# Altium PCB MRIAMP.PcbDoc (part 2 of 2)
Units mm, origin at the board's own origin, x right, y up, seen from the top; angles counter-clockwise.
Board outline 150.25 x 132.25 mm, 4 copper layers (Top Layer, Signal Layer 1, Signal Layer 2, Bottom Layer), stack 0.971 mm thick; 235 components, 124 nets, 584 pads, 101 vias.
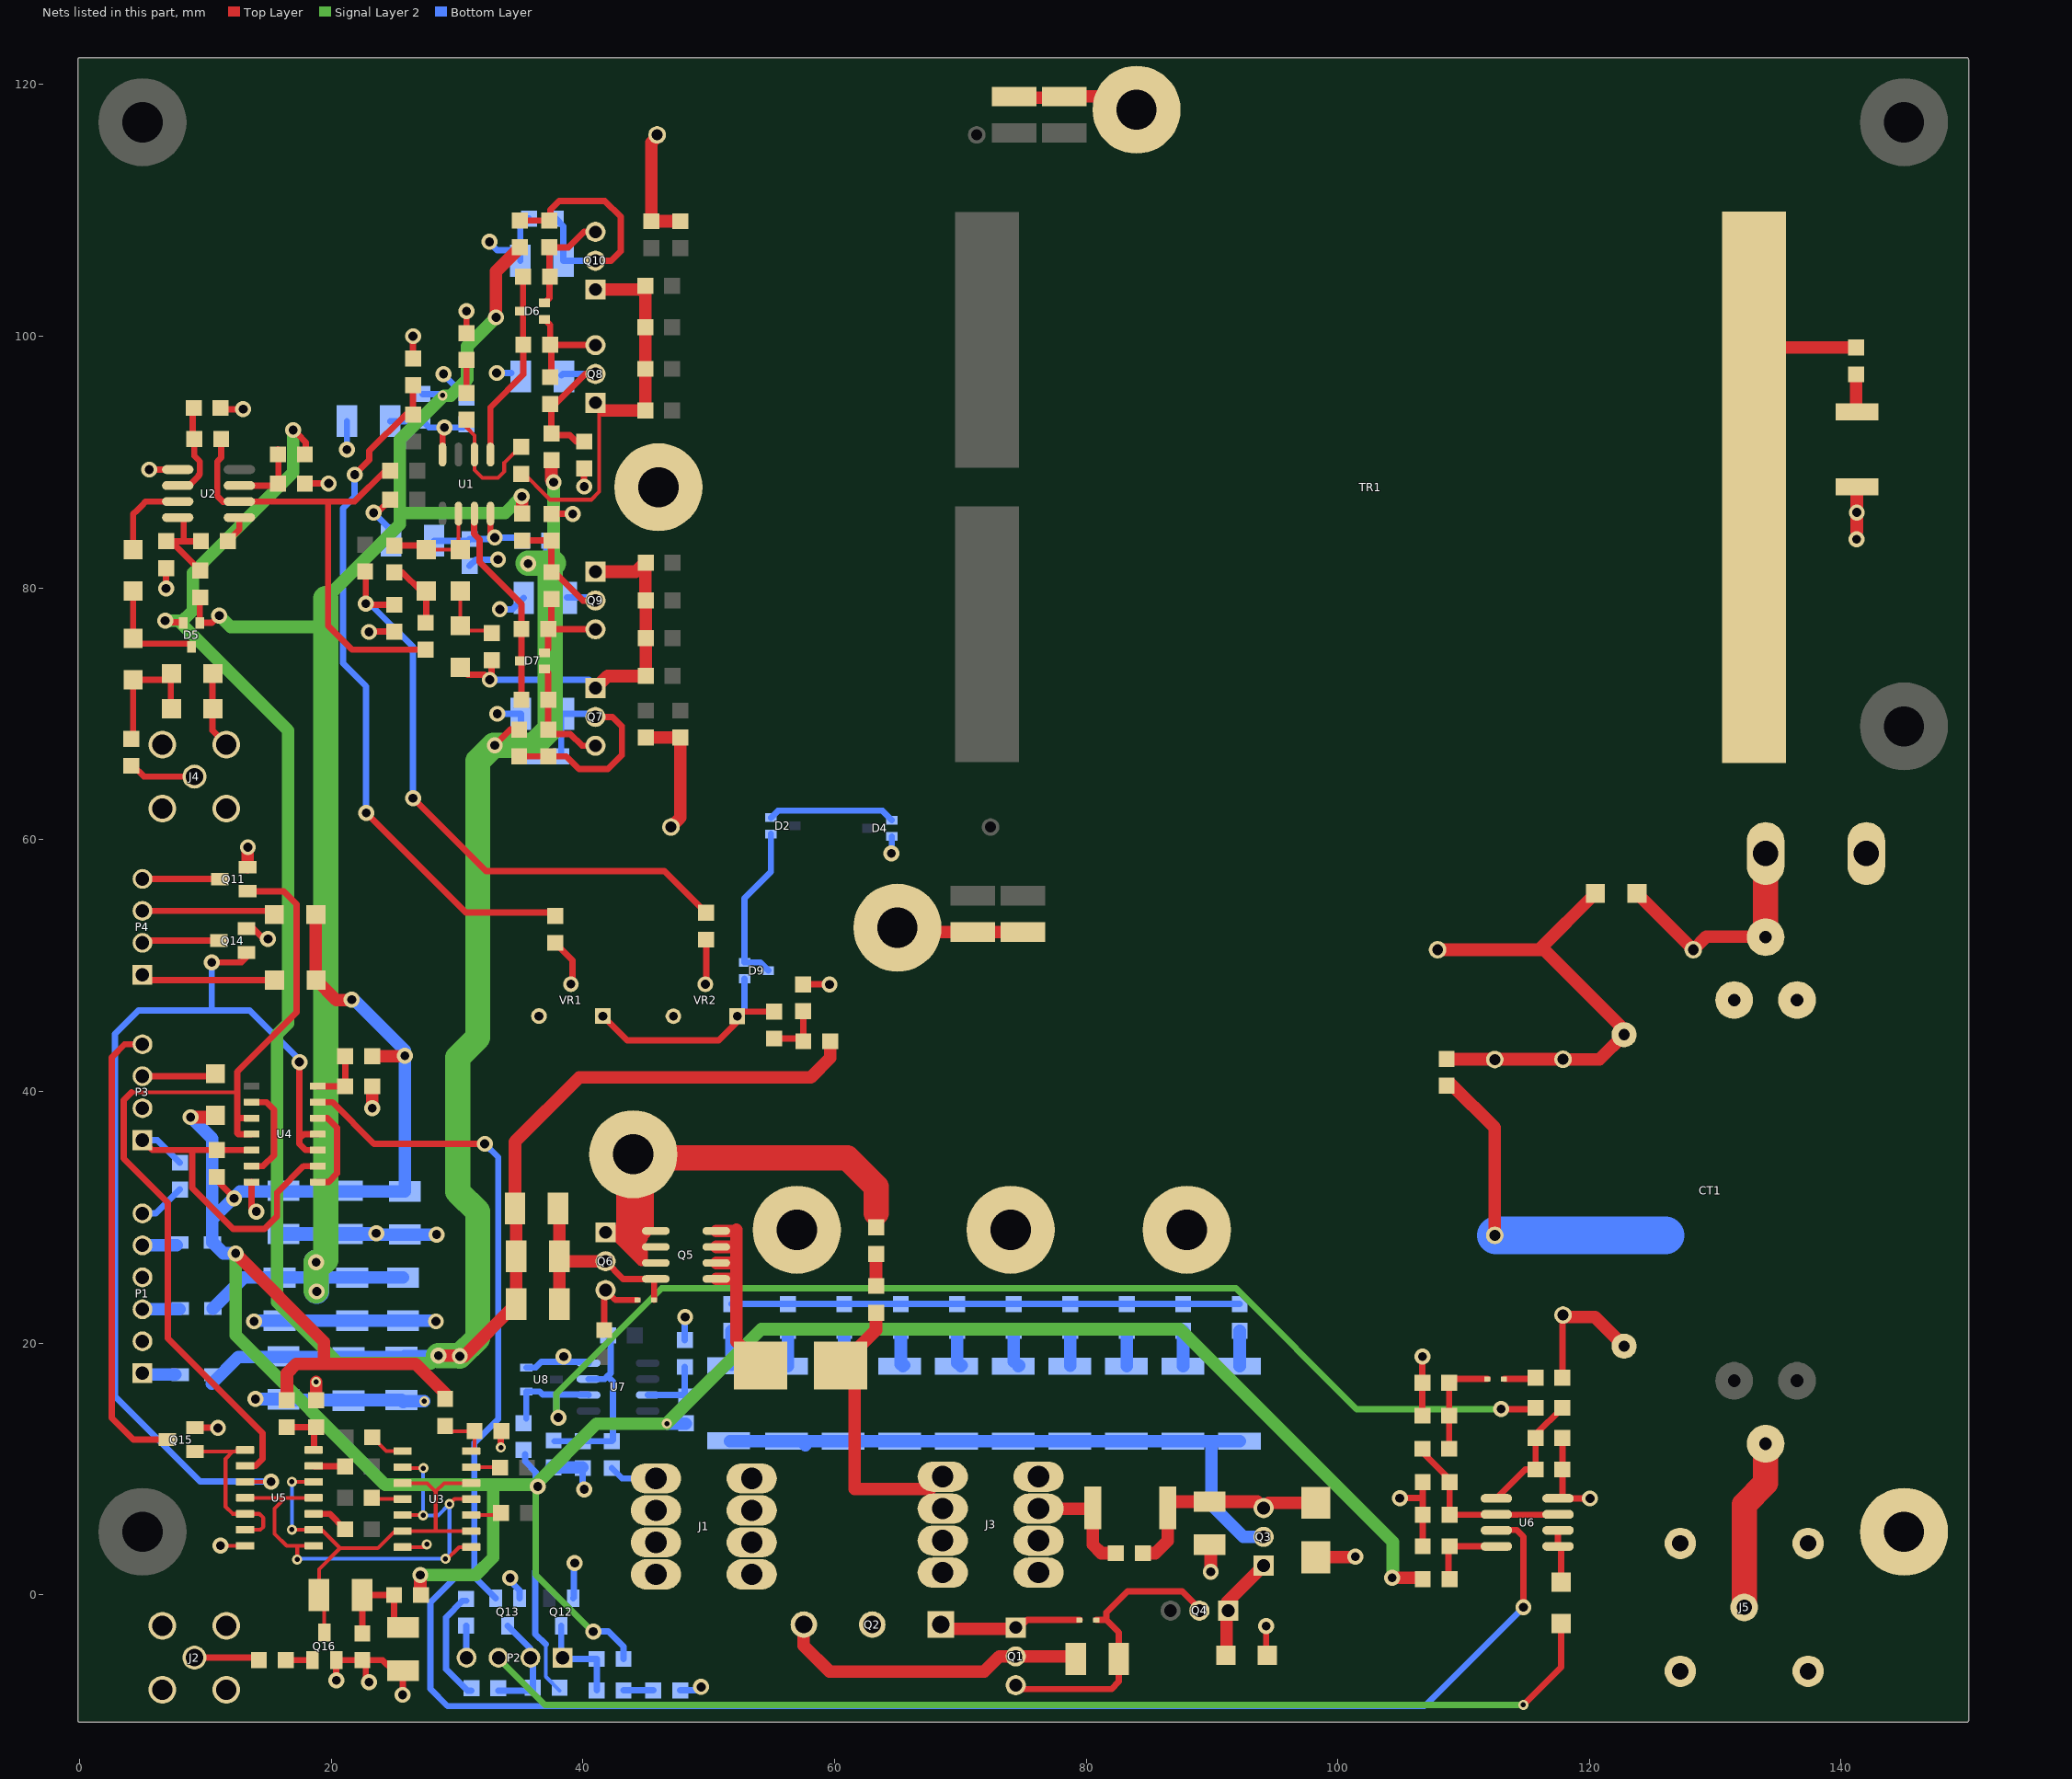
[diagram p4: the nets of this part, all layers, seen from the top]

## Via types
v1: diameter 1.27, hole 0.711, Top Layer to Bottom Layer, 85 vias
v2: diameter 0.8, hole 0.4, Top Layer to Bottom Layer, 16 vias

## Nets (pads, with @x,y where several pads share a name; then routed paths per layer and width w, separated by ;. In a path a pad name is that pad's centre, name@x,y a point inside that pad or via, vN(x,y) a via of type N, cw(c..) or ccw(c..) an arc to the next point about the centre after c; other vN are vias at no path point) (continued)
GND: C1.1 C12.1 C14.1 C18.1 C23.1 C24.1 C25.1 C26.2 C27.1 C28.1 C29.2 C33.2 C37.2 C39.2 C40.1 C41.1 C43.2 C44.2 C45.2 C46.2 C47.2 C48.2 C49.2 C50.2 C51.2 C52.2 C53.2 C54.2 C55.1 C56.1 C58.1 C59.1 C61.1 C62.1 C63.1 C64.1 C65.1 C66.1 C67.1 C126.2 C140.1 D3.1 D4.2 J2.2 J2.3 J2.4 J2.5 J4.2 J4.3 J4.4 J4.5 MH7.1 MH8.1 P1.2 P1.4 P1.6 P2.4 P3.2 Q5.1 Q5.2 Q5.3 Q6.1 Q11.2 Q12.2 Q13.2 Q14.2 Q15.2 Q16.2 R19.1 R20.1 R21.2 R48.1 R49.1 R57.1 R73.2 R74.2 R92.2 R94.2 R95.1 R96.1 U2.1 U3.7 U4.7 U5.7 U6.4 U7.4 U8.2 VR1.3 VR2.3 | length 211.5
  Top Layer w0.3: v1@11.5,3.9 11.51,3.89 U5.7@13.154,3.89 ; U3.7@25.675,3.79 27.39,3.79 v2(27.6,4)
  Top Layer w0.5: v1(5.525,89.4) 7.795,89.4 U2.1@7.8,89.405 ; v1(6.875,79.95) 6.875,81.021 C41.1@6.9,81.046 ; Q15.2@9.175,13.275 v1@10.475,13.275 ; R48.1@10.552,72.771 10.552,68.666 J4.3@11.667,67.551 ; R57.1@11.184,94.2 v1(13,94.2) ; Q14.2@13.641,52.925 Q14.2@13.275,52.925 13.825,52.925 v1@14.65,52.1 ; v1@13.675,30.675 U4.7@13.675,32.79 ; C28.1@17.904,88.3 v1(19.8,88.3) ; v1(20.4,-6.8) Q16.2@20.4,-5.2 C55.1@22.75,-5.175 ; v1@22.75,-6.675 C55.1@22.75,-5.175 ; v1(23,76.5) 23.25,76.5 23.279,76.529 C14.1@25,76.529 ; v1@23.696,86 C33.2@24.696,87 ; v1@25.7,-7.925 C54.2@25.7,-6.029 24.904,-6.029 24.075,-5.2 C55.1@22.75,-5.175 ; C12.1@26.5,98.24 v1(26.5,100) ; C23.1@30.75,100.25 v1(30.75,102) ; v2(33.475,11.7) 33.475,12.7 33.65,12.875 C58.1@33.525,13 ; C44.2@37.5,85.884 39.191,85.884 v1(39.2,85.875) ; v1@40.025,87.925 39.975,87.925 v1(40.1,88.05) C24.1@40.1,89.5 ; C1.1@57.512,48.5 v1(59.6,48.5) ; R19.1@94.3,-4.8 v1@94.3,-2.6 ; v1@104.9,7.7 v1(104.925,7.675) 106.75,7.675 ; R94.2@106.716,14.225 C63.1@106.716,16.85 106.716,18.559 v1@106.725,18.55 ; C56.1@106.75,3.85 R95.1@106.75,6.35 106.75,7.675 ; C64.1@106.75,8.95 106.75,7.675 ; U6.4@117.5,7.655 v1(120.045,7.655) ; 117.85,8.005 C65.1@117.85,9.95 R96.1@117.85,12.45 ; v1@94.3,-2.6 v1(94.3,-2.5) 94.2,-2.4 94.2,-2.5 v1@94.3,-2.6
  Top Layer w1: Q11.2@13.35,57.8 v1@13.35,59.05 ; v2(18.8,16.9) 18.8,15.725 C66.1@18.85,15.675 ; v1(23.25,38.65) C61.1@23.25,40.4 ; Q6.1@41.8,28.79 41.915,28.905 44.675,28.905 44.675,28.33 44.475,28.13 44.475,27.38 44.675,27.18 44.675,26.605 42.955,28.325 43.84,28.325 ; MH8.1@44,35 MH8.1@44.3,34.7 ; R20.1@89.8,3.971 89.9,3.871 v1@89.9,2.2 ; D3.1@98.355,2.982 101.118,2.982 v1@101,3 ; v1@141.25,84.5 v1(141.25,86) R21.2@141.25,88.025
  Top Layer w2: MH8.1@44.3,34.7 61,34.7 63.3,32.4 63.3,30.325
  Top Layer w3: 44.15,29.38 MH8.1@44.15,32.475
  Bottom Layer w0.5: P1.6@5,30.3 6.075,30.3 C67.1@7.975,32.2 ; v1(21.25,91) C37.2@21.25,93.25 ; v1(23.375,85.975) 24.75,84.6 C29.2@24.75,83.75 ; v1(28.925,97) 28.884,97 C39.2@30.75,95.134 ; P2.4@30.725,-5.115 R74.2@30.725,-2.459 ; C27.1@31,81.75 31.5,82.25 v1(33.25,82.25) ; v1@32.725,107.275 33.175,106.825 C40.1@34.6,106.825 ; v1(33.15,97.079) C26.2@34.321,97.079 ; v1(33.2,70) C126.2@35.071,70 35.071,68.479 36.15,67.4 C25.1@36.15,66.625 ; v1(33.4,78.3) 34.4,78.3 C140.1@35.3,79.2 ; v1@34.175,1.15 34.975,0.35 Q13.2@34.975,-0.275 ; C40.1@35.025,106 35.025,108.659 C43.2@35.716,109.35 ; U8.2@35.5,18.05 36.25,18.05 36.7,18.5 v1@38.575,18.5 ; v1@38.575,19.25 v1@38.575,18.5 ; Q12.2@39.225,-0.275 39.275,-0.225 v1@39.275,2.575 ; R92.2@39.988,10.066 39.988,8.712 v1@40,8.7 ; U7.4@40.45,18.405 40.355,18.5 v1@38.575,18.5 ; R73.2@47.734,-7.6 v1@49.2,-7.6 ; C59.1@48.1,20.234 v1@48.1,21.8 ; D4.2@64.55,60.25 64.55,59.15 v1@64.6,59.1
  Bottom Layer w1: v1@13.752,21.777 C50.2@16.2,21.777 ; v1@14.125,15.55 16.171,15.55 C45.2@16.2,15.521 ; C51.2@16.2,28.671 16.254,28.725 v1(23.575,28.725) ; C50.2@16.206,21.771 C49.2@25.7,21.771 v1@28.346,21.771 ; C45.2@16.25,15.471 C47.2@25.575,15.471 25.721,15.325 25.771,15.375 v2(27.4,15.375) ; C51.2@16.25,28.621 C53.2@25.85,28.621 v1(28.371,28.621) ; C62.1@37.5,10.116 R92.2@39.938,10.116
  other v1: 25.675,-7.95 49.4,-7.325 23,-6.95 34.225,1.325 89.9,1.825 39.35,2.525 101.4,3.025 11.2,3.9 40.1,8.375 11,13.25 13.975,15.55 38.475,18.925 106.725,18.925 13.875,21.725 28.325,21.725 48.125,22.075 14.05,30.45 14.975,52.1 64.525,58.9 13.375,59.4 141.225,83.875 32.575,107.5
LEDactive: P3.4 Q15.3 | length 36.7
  Top Layer w0.5: P3.4@5,43.74 3.59,43.74 2.55,42.7 2.55,14.05 4.275,12.325 Q15.3@6.975,12.325
LEDdcfail: P4.4 Q11.3 | length 6.2
  Top Layer w0.5: P4.4@5,56.88 Q11.3@11.15,56.88
LEDprfl: P4.2 Q14.3 | length 5.9
  Top Layer w0.5: P4.2@5.175,51.975 Q14.3@11.075,51.975
NetC1_2: C1.2 R1.1 R13.2 | length 4.8
  Top Layer w0.5: R13.2@55.2,44.2 57.3,44.2 R1.1@57.524,43.976 57.524,46.354 C1.2@57.512,46.366
NetC2_1: C2.1 C3.1 C4.1 C5.1 C6.1 C7.1 C8.1 C9.1 C10.1 C11.1 MH1.1 MH2.1 MH3.1 | length 40.4
  Bottom Layer w0.5: C6.1@51.8,23.1 C5.1@56.289,23.1 C4.1@60.778,23.1 C3.1@65.267,23.1 C2.1@69.756,23.1 C11.1@74.244,23.1 C10.1@78.733,23.1 C9.1@83.222,23.1 C8.1@87.711,23.1 C7.1@92.2,23.1
NetC2_2: C2.2 R3.1 | length 2.6
  Bottom Layer w1: R3.1@69.756,18.424 C2.2@69.756,20.966 ; R3.1@70.027,18.152 R3.1@70.098,18.223
NetC3_2: C3.2 R4.1 | length 2.8
  Bottom Layer w1: R4.1@65.267,18.327 C3.2@65.267,20.966 ; R4.1@65.441,18.152 R4.1@65.526,18.237
NetC4_2: C4.2 R5.1 | length 2.9
  Bottom Layer w1: R5.1@60.778,18.229 C4.2@60.778,20.966 ; R5.1@60.855,18.152 R5.1@60.954,18.251
NetC5_2: C5.2 R6.1 | length 2.8
  Bottom Layer w1: R6.1@56.289,18.172 C5.2@56.289,20.966
NetC6_2: C6.2 R7.1 | length 2.9
  Bottom Layer w0.5: R7.1@51.683,18.152 R7.1@51.8,18.269
  Bottom Layer w1: R7.1@51.8,18.269 C6.2@51.8,20.966
NetC7_2: C7.2 R8.1 | length 2.8
  Bottom Layer w1: R8.1@92.2,18.152 C7.2@92.2,20.966
NetC8_2: C8.2 R9.1 | length 2.8
  Bottom Layer w1: R9.1@87.711,18.165 C8.2@87.711,20.966
NetC9_2: C9.2 R10.1 | length 2.8
  Bottom Layer w1: R10.1@83.222,18.178 C9.2@83.222,20.966
NetC10_2: C10.2 R11.1 | length 2.8
  Bottom Layer w1: R11.1@78.733,18.191 C10.2@78.733,20.966
NetC11_2: C11.2 R12.1 | length 2.5
  Bottom Layer w1: R12.1@74.244,18.521 C11.2@74.244,20.966 ; R12.1@74.614,18.152 R12.1@74.67,18.208
NetC12_2: C12.2 R14.1 R15.2 | length 55.8
  Top Layer w0.5: v1(21.861,89) 23.021,90.16 23.021,90.896 25.895,93.77 R15.2@26.5,93.77 C12.2@26.5,96.107 ; v1(22.775,62.125) 30.7,54.2 37.534,54.2 R14.1@37.8,53.934
  Bottom Layer w0.5: v1(21.861,89) 21.861,87.261 20.939,86.339 20.939,74.011 22.775,72.175 v1(22.775,62.125)
NetC13_1: C13.1 D3.2 Q3.3 R16.2 R20.2 | length 17.4
  Top Layer w1: C13.1@84.5,3.3 85.5,3.3 86.475,4.275 R16.2@86.475,6.9 86.975,7.4 R20.2@89.8,7.4 93.59,7.4 Q3.3@94.1,6.89 94.51,7.3 D3.2@98.255,7.3
NetC14_2: C14.2 R17.1 R18.2 | length 49.1
  Top Layer w0.5: R18.2@22.688,81.3 22.75,81.238 v1(22.75,78.75) 22.837,78.663 C14.2@25,78.663 ; v1(26.5,63.3) 32.3,57.5 46.484,57.5 R17.1@49.8,54.184
  Bottom Layer w0.5: v1(22.75,78.75) 23.075,78.75 26.5,75.325 v1(26.5,63.3)
NetC15_1: C15.1 TR1.2 | length 18.2
  Top Layer w1: TR1.2@133.096,88.011 133.096,97.396 134.8,99.1 C15.1@141.2,99.1
NetC15_2: C15.2 R21.1 | length 3
  Top Layer w1: C15.2@141.2,96.966 141.2,94.025 R21.1@141.25,93.975
NetC16_1: C16.1 C144.1 MH5.1 | length 10.4
  Top Layer w1: MH5.1@65,53 65.35,52.65 72,52.65 C144.1@75.3,52.65
NetC17_1: C17.1 C143.1 MH4.1 | length 12.6
  Top Layer w1: C143.1@73.375,118.95 77.2,118.95 77.3,119.05 82.95,119.05 MH4.1@84,118 MH4.1@82.967,116.967
NetC18_2: C18.2 R23.1 | length 2.5
  Top Layer w1: R23.1@63.3,24.534 C18.2@63.3,27.066
NetC23_2: C23.2 R27.1 | length 2.6
  Top Layer w0.5: R27.1@30.75,95.5 C23.2@30.75,98.116
NetC24_2: C24.2 C26.1 Q8.2 R31.1 R38.1 | length 12.9
  Top Layer w0.5: C24.2@40.1,91.634 39.466,91.634 38.966,92.134 37.5,92.134 37.5,94.366 37.25,94.616 R38.1@37.4,94.616 37.816,94.616 40.2,97 Q8.2@41,97
  Bottom Layer w0.5: C26.1@38.3,96.9 38.4,97 Q8.2@41,97
NetC25_2: C25.2 C126.1 Q7.2 R32.2 R39.1 | length 19.9
  Top Layer w0.5: R32.2@34.938,66.616 R39.1@37.25,66.616 38.684,66.616 39.7,65.6 42,65.6 43.1,66.7 43.1,69 42.35,69.75 Q7.2@41,69.75
  Bottom Layer w0.5: C25.2@38.284,66.625 C126.1@38.284,69.784 ; C126.1@38.5,70 40.75,70 Q7.2@41,69.75 Q7.2@40.75,69.5
NetC27_2: C27.2 C29.1 R33.1 U1.8 | length 9.4
  Top Layer w0.5: U1.8@32.655,85.9 32.655,84.095 32.75,84 v1(33,84)
  Bottom Layer w0.5: C29.1@28.179,83.75 30.866,83.75 C27.2@31,83.884 32.884,83.884 v1(33,84) 34.938,84 R33.1@35.188,83.75
NetC28_2: C28.2 R36.1 U2.7 | length 5.7
  Top Layer w0.5: U2.7@12.7,88.135 15.247,88.135 15.8,88.688 15.8,90.971 R36.1@15.771,91
NetC30_1: C30.1 D6.1 Q8.3 R38.2 | length 8.4
  Top Layer w0.5: D6.1@36.95,101.35 37.4,100.9 C30.1@37.4,99.314 ; R38.2@37.25,96.75 37.5,97 37.5,99.314 40.976,99.314 Q8.3@41,99.29
NetC30_2: C30.2 C35.2 D6.3 U1.1 | length 15.3
  Top Layer w0.5: U1.1@32.655,90.6 32.655,94.355 35.255,96.955 C30.2@35.255,99.145 ; C30.2@34.95,99.314 35.25,99.614 35.25,101.8 D6.3@35.05,102 35.25,102.2 C35.2@35.25,104.737
NetC31_1: C31.1 D7.1 Q7.3 R39.2 | length 9.2
  Top Layer w0.5: D7.1@36.95,73.553 37.25,73.253 C31.1@37.25,71.12 R39.2@37.25,68.75 37.6,68.4 39,68.4 39.94,67.46 Q7.3@41,67.46
NetC31_2: C31.2 C36.2 D7.3 U1.7 | length 16.2
  Top Layer w0.5: U1.7@31.35,85.75 31.35,84.3 31.8,83.85 31.8,82.05 35.116,78.734 C36.2@35.116,76.75 C31.2@35.116,71.12
NetC32_2: C32.2 C38.1 R51.2 U2.6 | length 38
  Top Layer w0.5: R51.2@11.25,91.838 11.25,90.35 10.946,90.046 10.946,87.284 11.4,86.83 11.4,86.865 U2.6@12.7,86.865 21.865,86.865 24.312,89.312 C32.2@24.696,89.312 ; 19.75,86.75 19.75,77 21.648,75.102 C38.1@27.5,75.102
NetC34_2: C34.2 J4.1 | length 5.2
  Top Layer w0.5: C34.2@4.25,65.866 5.106,65.011 J4.1@9.127,65.011
NetC35_1: C35.1 D6.2 Q10.3 R53.1 | length 8.7
  Top Layer w0.5: D6.2@36.95,102.65 37.338,103.038 R53.1@37.338,107.061 38.861,107.061 40.09,108.29 Q10.3@41,108.29
NetC36_1: C36.1 D7.2 Q9.3 R54.1 | length 8.2
  Top Layer w0.5: D7.2@36.95,74.853 37.25,75.153 C36.1@37.25,76.71 ; R54.1@37.5,79.116 37.5,76.96 C36.1@37.25,76.71 ; Q9.3@41,76.71 C36.1@37.25,76.71
NetC37_1: C37.1 C39.1 R52.1 U1.4 | length 8.6
  Top Layer w0.5: U1.4@28.845,90.6 28.845,92.595 v1(29,92.75)
  Bottom Layer w0.5: C37.1@24.679,93.25 27.227,93.25 R52.1@27.25,93.273 27.773,92.75 v1(29,92.75) 30.5,92.75 C39.1@30.75,93
NetC38_2: C38.2 C142.2 R47.2 | length 5.7
  Top Layer w0.5: C142.2@25,81.234 25.666,81.234 27.15,79.75 R47.2@27.557,79.75 27.557,77.292 C38.2@27.5,77.235
NetC40_2: C40.2 C43.1 Q10.2 R53.2 R55.1 | length 20.7
  Top Layer w0.5: R55.1@35,109.195 37.162,109.195 37.425,109.458 37.425,110.05 38.125,110.75 41.75,110.75 43,109.5 43,106.75 42.25,106 Q10.2@41,106
  Bottom Layer w0.5: C43.1@37.85,109.35 38.454,108.746 C40.2@38.454,106 Q10.2@41,106
NetC41_2: C41.2 C42.2 R50.1 U2.4 | length 8.2
  Top Layer w0.5: C41.2@6.9,83.525 C41.2@6.992,83.617 ; C41.2@6.9,83.709 C41.2@6.992,83.617 ; 8.273,83.746 U2.4@8.273,85.516 ; R50.1@9.6,81.375 7.358,83.617 C41.2@6.992,83.617 ; C42.2@9.6,83.7 7.075,83.7 C41.2@6.992,83.617
NetC42_1: C42.1 U2.5 | length 2.3
  Top Layer w0.5: C42.1@11.775,83.725 12.7,84.65 U2.5@12.7,85.595
NetC44_1: C44.1 C140.2 Q9.2 R54.2 R56.2 | length 11.6
  Top Layer w0.5: R56.2@35.175,83.766 C44.1@37.484,83.766 ; C44.1@37.5,83.75 R54.2@37.5,81.25 37.75,81.25 40,79 Q9.2@41,79
  Bottom Layer w0.5: C140.2@38.729,79.25 40.75,79.25 Q9.2@41,79
NetC54_1: C54.1 C55.2 R60.2 R62.2 | length 7.4
  Top Layer w0.5: R62.2@22.454,-0.025 R60.2@24.991,-0.025 C54.1@24.991,-1.891 ; C55.2@22.475,-3.066 R62.2@22.475,-0.046
NetC56_2: C56.2 R79.2 U6.8 | length 6.3
  Top Layer w0.5: R79.2@108.784,1.35 108.784,3.85 U6.8@112.595,3.85
NetC57_1: C57.1 C60.2 CT1.3 R80.2 R83.2 R86.1 | length 38.7
  Top Layer w1: R80.2@107.93,51.25 116,51.25 ; C60.2@108.884,42.55 R83.2@117.755,42.55 ; R83.2@117.9,42.545 120.795,42.545 CT1.3@122.75,44.5 122.75,44.9 116.4,51.25 116,51.25 ; C57.1@120.475,55.725 116,51.25
NetC57_2: C57.2 CT1.1 P5.1 R80.1 | length 19.2
  Top Layer w1: C57.2@123.777,55.723 R80.1@128.25,51.25 129.3,52.3 133.95,52.3 CT1.1@134,52.25
  Top Layer w2: CT1.1@134,52.25 P5.1@134,58.9
NetC58_2: C58.2 R81.2 U3.14 | length 3.2
  Top Layer w0.3: R81.2@29.466,13 C58.2@31.391,13 U3.14@31.391,11.676
NetC59_2: C59.2 R82.2 U7.7 | length 5.2
  Bottom Layer w0.5: U7.7@45.15,15.865 48.098,15.865 48.1,15.867 C59.2@48.1,18.1
NetC61_2: C61.2 R87.2 U4.14 | length 4.6
  Top Layer w0.5: U4.14@18.935,40.4 C61.2@21.116,40.4 R87.2@21.116,42.8
NetC62_2: C62.2 R88.2 R92.1 R97.1 U7.3 | length 15
  Bottom Layer w0.5: C62.2@37.734,12.199 R92.1@39.988,12.199 R88.2@42.3,12.199 42.4,12.299 42.4,16.935 41.968,17.368 ; U7.3@40.45,17.135 41.735,17.135 41.968,17.368 ; R97.1@42,20.6 42.2,20.4 42.2,17.6 41.968,17.368
NetC63_2: C63.2 D10.1 R90.1 R94.1 | length 8
  Top Layer w0.5: R90.1@108.85,11.6 R94.1@108.85,14.225 C63.2@108.85,16.85 ; C63.2@109.15,17.15 D10.1@111.89,17.15
NetC64_2: C64.2 R90.2 R95.2 U6.3 U6.6 | length 14.8
  Top Layer w0.5: R90.2@106.716,11.6 106.716,11.359 108.884,9.191 C64.2@108.884,8.95 R95.2@108.884,6.35 117.465,6.35 U6.3@117.5,6.385
NetC65_2: C65.2 R91.2 R96.2 U6.5 | length 9.9
  Top Layer w0.5: U6.5@112.6,7.655 114.895,9.95 C65.2@115.716,9.95 R96.2@115.716,12.45 115.716,12.716 R91.2@117.85,14.85
NetC66_2: C66.2 R93.2 U5.14 | length 4.1
  Top Layer w0.5: R93.2@16.3,13.316 18.625,13.316 U5.14@18.625,11.51
NetC67_2: C67.2 P3.1 R68.2 U4.5 U4.9 | length 30.2
  Top Layer w0.5: P3.1@5,36.12 5.786,35.334 8.95,35.334 ; U4.5@13.675,35.33 13.671,35.334 R68.2@10.9,35.334 8.95,35.334 ; U4.9@18.925,34.06 17.81,34.06 15.7,31.95 15.7,30.075 14.7,29.075 12.2,29.075 8.95,32.325 8.95,35.334
  Bottom Layer w0.5: P3.1@5,36.12 6.189,36.12 C67.2@7.975,34.334
NetC141_1: C141.1 Q7.1 Q9.1 R30.1 R35.1 R37.1 R41.1 R44.1 | length 31
  Top Layer w0.5: R35.1@30.25,73.698 30.846,73.102 32.198,73.102 v1(32.6,72.7) 32.752,72.852 C141.1@32.752,74.266
  Top Layer w1: Q7.1@41,72.04 41.96,73 R44.1@45,73 R41.1@45,76 R37.1@45,79 44.958,79.042 44.958,82.042 44.206,81.29 Q9.1@41,81.29
  Bottom Layer w0.5: v1(32.6,72.7) 40.5,72.7 40.42,72.62 Q7.1@41,72.04
NetC141_2: C141.2 R35.2 R42.1 | length 5.9
  Top Layer w0.3: R42.1@30.25,79.75 30.25,77.25 30,77.25 R35.2@30.25,77 30.65,76.6 32.552,76.6 C141.2@32.752,76.4
NetC142_1: C142.1 R42.2 R47.1 U1.6 | length 8.3
  Top Layer w0.3: R47.1@27.557,83.052 R42.2@30.25,83.052 30.115,83.187 U1.6@30.115,85.9
  Top Layer w0.5: C142.1@25,83.367 27.242,83.367 R47.1@27.557,83.052
NetCT1_2: CT1.2 J5.1 | length 13.7
  Top Layer w2: J5.1@132.3,-1 132.3,7.175 134,8.875 CT1.2@134,12
NetCT1_4: CT1.4 R83.1 R89.1 | length 10.7
  Top Layer w0.5: R89.1@117.85,17.25 117.85,20.4 R83.1@117.85,22.075
  Top Layer w1: R83.1@117.85,22.075 120.425,22.075 CT1.4@122.75,19.75
NetD1_1: D1.1 Q1.3 Q4.2 R2.1 | length 24.2
  Top Layer w0.5: Q1.3@74.4,-7.19 74.71,-7.5 82,-7.5 82.6,-6.9 R2.1@82.6,-5.1 82.6,-3 81.6,-2 ; D1.1@80.8,-2 81.6,-2 ; Q4.2@88.925,-1.385 88.925,-1.025 87.625,0.275 83.275,0.275 81.6,-1.4 81.6,-2
NetD1_2: D1.2 Q1.1 Q2.1 | length 11.4
  Top Layer w0.5: Q1.1@74.19,-2.7 74.61,-2.7 75.31,-2 D1.2@79.48,-2
  Top Layer w1: Q2.1@68.461,-2.9 68.661,-2.7 Q1.1@74.19,-2.7
NetD2_1: D2.1 D9.2 D9.3 | length 13.2
  Bottom Layer w0.5: D9.3@54.75,49.6 54.1,50.25 D9.2@52.85,50.25 52.85,55.35 54.95,57.45 D2.1@54.95,60.45
NetD2_2: D2.2 D4.1 | length 10.1
  Bottom Layer w0.5: D2.2@54.95,61.75 55.5,62.3 63.8,62.3 D4.1@64.55,61.55
NetD5_3: D5.3 R45.1 R46.2 | length 8.3
  Top Layer w0.5: R46.2@4.25,79.75 R45.1@4.25,76 4.675,75.575 D5.3@8.625,75.575
NetD8_1: D8.1 Q5.4 Q6.2 R22.1 R58.1 R59.1 | length 17.8
  Top Layer w0.5: Q6.2@41.8,26.5 43.205,25.095 Q5.4@45.8,25.095 45.66,24.955 D8.1@45.66,23.421
  Top Layer w1: R22.1@38.029,30.7 38.129,30.6 R58.1@38.129,26.9 ; R59.1@38.129,23.1 R58.1@38.129,26.9 ; Q6.2@41.8,26.5 38.529,26.5 R58.1@38.129,26.9
NetD8_2: D8.2 Q6.3 R25.1 | length 6.1
  Top Layer w0.5: R25.1@41.7,21.029 41.7,24.11 Q6.3@41.8,24.21 42.589,23.421 D8.2@44.34,23.421
NetD9_1: D9.1 R13.1 VR1.1 VR2.1 | length 18.7
  Top Layer w0.5: VR1.1@41.727,45.841 43.518,44.05 50.8,44.05 52.272,45.522 VR2.1@52.272,45.968 ; VR2.1@52.25,45.99 VR2.1@52.272,45.968 ; R13.1@55.2,46.334 52.638,46.334 VR2.1@52.272,45.968
  Bottom Layer w0.5: VR2.1@52.272,45.968 52.85,46.546 D9.1@52.85,48.95
NetD10_2: D10.2 R89.2 | length 2.5
  Top Layer w0.5: D10.2@113.21,17.15 115.616,17.15 R89.2@115.716,17.25
NetFB1_1: FB1.1 P1.1 | length 1.7
  Bottom Layer w1: 5.9,17.5 FB1.1@7.6,17.5
NetFB2_1: FB2.1 P1.3 | length 2.9
  Bottom Layer w1: P1.3@5,22.68 FB2.1@7.93,22.68
NetFB3_1: FB3.1 P1.5 | length 2.7
  Bottom Layer w1: P1.5@5,27.76 FB3.1@7.71,27.76
NetJ2_1: J2.1 R78.1 | length 4.9
  Top Layer w0.5: J2.1@9.127,-5 R78.1@14.05,-5
NetP2_1: P2.1 Q12.3 R65.2 R70.1 | length 7.6
  Bottom Layer w0.5: Q12.3@38.275,-2.475 38.275,-5.045 P2.1@38.355,-5.125 ; P2.1@38.68,-5.1 R65.2@41.1,-5.1 R70.1@41.1,-7.6
NetP2_2: P2.2 Q13.3 R66.2 R71.1 | length 8.7
  Bottom Layer w0.5: R71.1@33.275,-7.625 36.025,-7.625 36.025,-5.335 35.815,-5.125 35.815,-4.265 Q13.3@34.025,-2.475
NetP2_3: P2.3 R84.1 | length 90.7
  Top Layer w0.5: v2(114.75,-8.75) 117.75,-5.75 R84.1@117.75,-2.302
  Signal Layer 2 w0.5: P2.3@33.295,-5.07 36.975,-8.75 v2(114.75,-8.75)
NetP3_3: P3.3 R67.2 | length 5.8
  Top Layer w0.5: P3.3@5,41.2 R67.2@10.8,41.2
NetP4_1: P4.1 R76.2 | length 10.7
  Top Layer w0.5: P4.1@5,49.26 5.41,48.85 R76.2@15.498,48.85
NetP4_3: P4.3 R77.2 | length 10.1
  Top Layer w0.5: P4.3@5,54.34 R77.2@15.075,54.34
NetQ3_1: Q3.1 Q4.1 R19.2 | length 8.4
  Top Layer w1: R19.2@90.998,-4.8 91.15,-4.648 91.15,-0.64 Q3.1@94.1,2.31
NetQ5_5: Q5.5 Q5.6 Q5.7 Q5.8 XF1.1 | length 18.1
  Top Layer w1: Q5.5@50.6,25.095 52.195,25.095 52.2,25.1 ; Q5.6@50.6,26.365 52.165,26.365 52.2,26.4 ; Q5.7@50.6,27.635 52.165,27.635 52.2,27.6 ; Q5.8@50.6,28.905 52.105,28.905 52.2,29 52.2,27.6 ; XF1.1@54.115,18.2 52.2,20.115 52.2,25.1 ; 52.2,25.1 52.2,26.4 ; 52.2,26.4 52.2,27.6
NetQ8_1: Q8.1 Q10.1 R28.2 R29.1 R34.1 R40.1 R43.1 | length 31.9
  Top Layer w0.3: R28.2@35.038,89.362 37.389,87.011 40.661,87.011 41.3,87.65 41.3,94.41 Q8.1@41,94.71
  Top Layer w1: Q10.1@41,103.71 44.655,103.71 44.958,103.407 R34.1@44.958,100.711 R40.1@44.958,97.409 R43.1@44.958,94.107 41.603,94.107 Q8.1@41.25,94.46
NetQ11_1: Q11.1 U4.3 U4.4 U5.2 | length 70.6
  Top Layer w0.3: 4.125,39.925 12.35,39.925
  Top Layer w0.5: 4.125,39.925 3.5,39.3 3.5,34.675 7.025,31.15 7.025,20.374 14.55,12.849 14.55,10.8 13.99,10.24 U5.2@13.154,10.24 ; Q11.1@13.35,55.9 16.225,55.9 17.25,54.875 17.25,46.275 12.525,41.55 12.525,37.87 ; U4.4@13.675,36.6 12.6,36.6 12.525,36.675 12.525,37.87 ; U4.3@13.675,37.87 12.525,37.87
NetQ14_1: Q14.1 U4.10 U4.11 U5.3 | length 79.4
  Top Layer w0.3: U5.3@13.154,8.97 v1@14.925,8.97
  Top Layer w0.5: v1(10.5,50.25) 12.85,50.25 Q14.1@13.45,50.85 ; v1@17.45,42.5 17.475,42.525 17.475,36.25 ; U4.10@18.925,35.33 17.97,35.33 17.475,35.825 17.475,36.25 ; U4.11@18.925,36.6 17.825,36.6 17.475,36.25
  Bottom Layer w0.5: 10.5,46.55 v1(10.5,50.25) ; v1@14.925,9 9.575,9 2.8,15.775 2.8,44.55 4.675,46.425 13.525,46.425 v1@17.45,42.5
  other v1: 15.225,8.975 17.475,42.325
NetQ15_1: Q15.1 U5.1 U5.5 U5.6 | length 14.2
  Top Layer w0.3: Q15.1@9.175,11.375 12.175,11.375 ; U5.1@12.515,11.375 12.175,11.375 ; U5.1@12.515,11.51 U5.1@13.154,11.51 ; U5.6@13.154,5.16 14.36,5.16 14.6,5.4 14.6,6.1 14.27,6.43 U5.5@13.154,6.43 12.17,6.43 11.6,7 11.6,10.8 12.175,11.375
NetQ16_1: Q16.1 R78.2 | length 2.1
  Top Layer w0.5: R78.2@16.384,-5.2 Q16.1@18.5,-5.2
NetQ16_3: Q16.3 R62.1 U3.3 U3.6 U3.9 U3.12 U5.9 U5.12 | length 37
  Top Layer w0.3: v2(16.875,5.175) U5.9@18.589,5.175 ; v2(16.875,8.975) 16.88,8.97 U5.12@18.604,8.97 ; U5.9@18.604,5.16 19.24,5.16 20.7,3.7 ; R62.1@19.025,-0.025 19.025,2.025 20.7,3.7 ; Q16.3@19.45,-3 R62.1@19.45,-0.45 ; U3.3@25.675,8.87 27.63,8.87 28.3,8.2 ; 28.3,5.06 28.3,8.2 ; U3.9@31.125,5.06 U3.6@25.675,5.06 25.06,5.06 23.7,3.7 20.7,3.7 ; U3.12@31.125,8.87 28.97,8.87 28.3,8.2
  Bottom Layer w0.3: v2(16.875,5.175) v2(16.875,8.975)
NetR14_2: R14.2 VR1.2 | length 4.2
  Top Layer w0.5: R14.2@37.8,51.8 39.187,50.413 39.187,48.381 VR1.2@39.05,48.518
NetR17_2: R17.2 VR2.2 | length 3.6
  Top Layer w0.5: R17.2@49.8,52.05 49.8,48.69 VR2.2@49.982,48.508
NetR27_2: R27.2 R28.1 U1.2 | length 9.3
  Top Layer w0.3: R27.2@30.75,93.366 30.75,92.75 31.385,92.115 U1.2@31.385,90.6 31.385,89.365 32,88.75 33.25,88.75 33.75,89.25 33.75,89.95 34.6,90.8 R28.1@34.6,91.1
NetR46_1: R46.1 U2.3 | length 6.8
  Top Layer w0.5: R46.1@4.25,83.052 4.25,85.85 4.591,86.191 4.924,86.524 5.265,86.865 U2.3@7.8,86.865
NetR51_1: R51.1 R57.2 U2.2 | length 7.6
  Top Layer w0.5: U2.2@7.8,88.135 8.692,88.135 9.5,88.943 9.473,88.97 9.554,89.051 9.554,90.046 9.116,90.484 R51.1@9.116,91.838 9,91.954 R57.2@9,94.25
NetR61_1: R61.1 U5.10 | length 3
  Top Layer w0.5: U5.10@18.604,6.43 19.87,6.43 R61.1@21.1,5.2
NetR63_1: R63.1 U5.13 | length 2.5
  Top Layer w0.5: U5.13@18.604,10.24 18.644,10.2 R63.1@21.1,10.2
NetR64_1: R64.1 U3.1 | length 2.9
  Top Layer w0.3: R64.1@23.266,12.512 24.368,11.41 U3.1@25.675,11.41
NetR69_1: R69.1 U3.4 | length 2.5
  Top Layer w0.3: R69.1@23.234,7.7 23.334,7.6 U3.4@25.675,7.6
NetR70_2: R70.2 R73.1 | length 2.4
  Bottom Layer w0.5: R70.2@43.234,-7.6 R73.1@45.6,-7.6
NetR71_2: R71.2 R74.1 | length 9
  Bottom Layer w0.5: R74.1@30.725,-0.476 30.449,-0.476 29.125,-1.8 29.125,-5.925 30.825,-7.625 R71.2@31.141,-7.625
NetR72_1: R72.1 U3.10 | length 2.4
  Top Layer w0.3: U3.10@31.125,6.33 33.33,6.33 R72.1@33.5,6.5
NetR75_1: R75.1 U3.13 | length 2.3
  Top Layer w0.3: U3.13@31.125,10.14 33.381,10.14 R75.1@33.421,10.1
NetR84_2: R84.2 U6.1 U6.2 | length 3.9
  Top Layer w0.5: U6.1@117.5,3.845 U6.2@117.5,5.115 ; R84.2@117.75,1 U6.1@117.75,3.595
NetU3_2: U3.2 U3.5 U3.8 U3.11 U5.4 U5.8 U5.11 | length 43.4
  Top Layer w0.3: U5.4@13.154,7.7 U5.11@18.604,7.7 ; 16.275,7.625 15.5,6.85 15.5,4.85 16.46,3.89 U5.8@18.604,3.89 U5.8@18.91,3.89 ; v2(17.3,2.8) 17.3,3.85 ; U3.5@25.675,6.33 27.27,6.33 v2(27.3,6.3) ; U3.2@25.765,10.05 v2(27.325,10.05) ; v2@29.175,2.8 30.165,3.79 U3.8@31.125,3.79 ; v2(29.4,7.2) 29.8,7.6 U3.11@31.125,7.6
  Signal Layer 2 w0.3: v2@27.3,10.025 v2(27.325,10.05)
  Bottom Layer w0.3: v2(17.3,2.8) 17.35,2.85 v2(29.075,2.85) 29.4,3.175 v2(29.4,7.2) 28.5,6.3 v2(27.3,6.3) v2@27.3,10.025
NetU4_2: U4.2 U4.6 | length 7.8
  Top Layer w0.5: U4.6@13.675,34.06 14.585,34.06 15.45,34.925 15.45,38.525 14.835,39.14 U4.2@13.675,39.14
NetU4_8: U4.8 U4.12 | length 7.3
  Top Layer w0.5: U4.8@18.925,32.79 19.79,32.79 20.475,33.475 20.475,37.1 19.705,37.87 U4.12@18.925,37.87
ref2V5: R85.2 R91.1 U7.2 U8.1 | length 96.2
  Top Layer w0.5: v1(112.975,14.75) R91.1@115.616,14.75
  Signal Layer 2 w0.5: v1@37.9,14.05 37.9,16 46.25,24.35 91.9,24.35 101.5,14.75 v1(112.975,14.75)
  Bottom Layer w0.5: R85.2@35.5,14 U8.1@35.5,16.15 36.55,16.15 36.8,15.9 40.415,15.9 U7.2@40.45,15.865 ; v1@37.9,14.05 37.9,15.9
  other v1: 38.05,14.075
RFB1: C20.2 C21.2 R26.1 | length 9.4
  Top Layer w1: R26.1@46.05,116 45.438,115.388 C20.2@45.438,109.134 C21.2@47.75,109.134
RFB2: C19.2 C22.2 R24.1 | length 10.2
  Top Layer w1: C19.2@45,68.116 C22.2@47.75,68.116 47.75,61.75 R24.1@47,61
RFgnd: C60.1 CT1.5 CT1.6 J5.2 J5.3 J5.4 J5.5 MH6.1 P5.2 R86.2 | length 26.6
  Top Layer w1: C60.1@109.025,40.55 112.475,37.1 R86.2@112.475,28.805
  Bottom Layer w3: R86.2@112.575,28.555 126.03,28.555
RFIN: C34.1 R45.2 R48.2 R49.2 | length 10.4
  Top Layer w0.5: C34.1@4.25,68 R45.2@4.25,72.698 7.177,72.698 7.25,72.771 R49.2@7.25,70.078
SWRok: Q13.1 U4.13 U6.7 | length 162.3
  Top Layer w0.254: U6.7@112.715,5 U6.7@112.865,5.15
  Top Layer w0.5: U4.13@18.925,39.14 20.085,39.14 23.4,35.825 v1(32.2,35.825) ; U6.7@112.865,5.15 114.2,5.15 114.75,4.6 v1(114.75,-1)
  Bottom Layer w0.5: 31.375,1.425 31.375,12.075 33.275,13.975 33.275,34.75 v1(32.2,35.825) ; Q13.1@33.075,-0.275 31.425,1.375 29.85,1.375 27.875,-0.6 27.875,-7.475 29.25,-8.85 106.85,-8.85 ; 107,-8.75 v1(114.75,-1)
VAMP: C13.2 J3.1 J3.2 J3.3 J3.4 J3.5 J3.6 J3.7 J3.8 Q2.2 R16.1 R23.2 XF1.2 | length 32.4
  Top Layer w1: R23.2@63.3,22.4 63.3,21.015 XF1.2@60.485,18.2 61.6,17.085 61.6,8.4 67.62,8.4 J3.1@68.6,9.38 ; J3.7@76.22,6.84 80.465,6.84 R16.1@80.525,6.9 80.525,3.975 81.2,3.3 C13.2@82.366,3.3
Vd: C51.1 C52.1 C53.1 FB3.2 R60.1 R65.1 R66.1 R67.1 R68.1 R76.1 R77.1 R79.1 R81.1 R82.1 R85.1 R87.1 R93.1 | length 263.6
  Top Layer w0.5: R68.1@10.775,33.05 v1@12.275,31.55
  Top Layer w1: v1(8.825,37.95) R67.1@10.65,37.95 ; v1(12.4,27.125) 19.425,20.1 19.425,18.35 ; R93.1@16.475,15.45 16.475,17.6 17.225,18.35 19.425,18.35 ; R77.1@18.775,54.05 18.775,48.875 R76.1@18.8,48.85 20.4,47.25 21.575,47.225 v1@21.725,47.375 ; R87.1@23.25,42.8 25.825,42.8 v1(25.85,42.825) ; R60.1@27.075,0.025 v1(27.075,1.575) ; R81.1@29.05,15.582 29.05,16 26.7,18.35 19.425,18.35 ; v1(104.325,1.35) R79.1@106.65,1.35
  Signal Layer 2 w0.5: v1@36.25,8.75 36.25,1.6 v1@40.75,-2.9
  Signal Layer 2 w1: v1(12.4,27.125) 12.4,20.625 24.275,8.75 32.875,8.75 ; v1(27.075,1.575) 31.5,1.575 32.875,2.95 32.875,8.75 ; v1@104.375,1.3 104.375,4.2 87.475,21.1 54.175,21.1 v2(46.675,13.6) 41.1,13.6 36.25,8.75 32.875,8.75
  Bottom Layer w0.3: 37.046,-3.946 37.046,-6.512 R66.1@38.159,-7.625
  Bottom Layer w0.5: R85.1@35.4,11.166 35.4,10.6 36.25,9.75 36.25,1.275 ; 36.225,1.875 36.225,-3.125 37.046,-3.946 ; v1@40.75,-2.9 42.025,-2.9 43.234,-4.109 R65.1@43.234,-5.1
  Bottom Layer w1: v1(8.825,37.95) 10.55,36.225 FB3.2@10.55,28 11.425,27.125 v1(12.4,27.125) ; 10.55,29.85 12.75,32.05 C53.1@25.85,32.05 v1(25.85,42.825) 25.85,43.25 v1@21.725,47.375 ; v2(46.675,13.6) R82.1@48.171,13.6
  other v1: 40.825,-2.925 36.425,8.6 12.275,31.5 21.625,47.275
VN: C48.1 C49.1 C50.1 D5.1 FB2.2 R50.2 R52.2 R55.2 R56.1 | length 133
  Top Layer w0.5: R50.2@9.55,79.191 D5.1@9.55,77.225 10.525,77.225 v1(11.1,77.8)
  Top Layer w1: v1(33.1,101.5) 33.1,105.161 R55.2@35,107.061 ; R56.1@35.175,85.9 v1@35.175,87.25
  Signal Layer 2 w1: v1(11.1,77.8) 12,76.9 18.75,76.9 ; 19.575,79.175 25.45,85.05 25.45,85.95 ; v1(33.1,101.5) 30.8,99.2 30.8,96.575 29.5,95.275 28.95,95.275 25.45,91.775 25.45,85.95 ; v1(35.15,87.275) 33.825,85.95 25.45,85.95
  Signal Layer 2 w2: v1@18.8,24.15 v1(18.8,26.425) ; v1@19.425,26.45 19.575,26.6 19.575,79.175
  Bottom Layer w0.5: R52.2@27.25,95.406 v2@28.594,95.406
  Bottom Layer w1: FB2.2@10.6,22.75 13.05,25.2 C50.1@15.9,25.2 19,25.2 C48.1@21.675,25.2 C49.1@25.7,25.2
  Bottom Layer w2: v1(18.8,26.425) 18.8,25.4 19,25.2 18.85,25.05 v1(18.85,24.1)
  other v2: 28.85,95.3
VP: C45.1 C46.1 C47.1 D5.2 FB1.2 R1.2 R22.2 R31.2 R32.1 R33.2 R36.2 R58.2 R59.2 | length 253.1
  Top Layer w0.5: v1@7.3,77.275 D5.2@8.2,77.275 ; v1@16.989,92.201 17.349,92.201 17.98,91.57 R36.2@17.98,90.921 ; R36.2@17.82,90.545 17.832,90.623 R36.2@17.86,90.801 ; v1(33,67.5) 34.25,68.75 R32.1@34.938,68.75
  Top Layer w1: v1(28.525,19) 30.5,19 30.55,18.95 R59.2@34.7,23.1 R58.2@34.7,26.9 34.7,30.6 R22.2@34.6,30.7 34.6,36 39.7,41.1 58.1,41.1 59.658,42.658 R1.2@59.658,43.976 ; R31.2@37.5,90 37.5,88.575 v1(37.675,88.4)
  Signal Layer 2 w1: v1(6.8,77.4) 7.85,77.4 ; v1(16.975,92.55) 16.975,89.175 9,81.2 9,78.2 8.025,77.225 16.575,68.675 16.575,45.4 15.7,44.525 15.7,23.25 20.55,18.4 27.925,18.4 v1(28.525,19) ; v1@30.15,19 v1@30.2,18.95 ; v1@35.65,81.975 v1@35.65,82.3 ; 37.675,81.975 v1(37.675,88.4)
  Signal Layer 2 w2: v1(28.525,19) v1@30.15,19 ; v1@30.2,18.95 31.65,20.4 31.65,30.425 30.05,32.025 30.05,42.675 31.65,44.275 31.65,66.25 v1@32.9,67.5 ; v1(33,67.5) 36.1,67.5 37.4,68.8 37.4,81.55 ; v1@35.65,81.975 37.675,81.975
  Bottom Layer w0.5: R33.2@37.022,83.75 R33.2@37.322,83.75
  Bottom Layer w1: 10.5,16.775 12.625,18.9 C47.1@25.575,18.9 ; C47.1@25.825,18.95 v1(30.225,18.95) ; v1(35.65,81.925) 36.575,81.925 37.322,82.672 R33.2@37.322,83.75
VSUP: J1.1 J1.2 J1.3 J1.4 J1.5 J1.6 J1.7 J1.8 Q1.2 Q2.3 Q3.2 R2.2 R3.2 R4.2 R5.2 R6.2 R7.2 R8.2 R9.2 R10.2 R11.2 R12.2 R88.1 | length 81.4
  Top Layer w1: Q2.3@57.539,-2.9 57.539,-4.039 59.6,-6.1 71.9,-6.1 73.1,-4.9 78.971,-4.9 R2.2@79.171,-5.1
  Bottom Layer w0.5: R88.1@42.3,10.066 43.126,9.24 J1.1@45.8,9.24
  Bottom Layer w1: R7.2@51.683,12.202 R6.2@56.185,12.202 R6.2@57.36,12.202 ; R6.2@57.68,11.882 R6.2@57.36,12.202 ; Q3.2@94.1,4.6 92.5,4.6 89.95,7.15 89.95,12.05 90.102,12.202 R8.2@92.2,12.202 R9.2@87.698,12.202 R10.2@83.196,12.202 R11.2@78.694,12.202 R12.2@74.192,12.202 R3.2@69.691,12.202 R4.2@65.189,12.202 R5.2@60.687,12.202 R6.2@57.36,12.202
pads on no net: CT1.7 CT1.8 D2.3 D4.3 MH9.1 MH10.1 MH11.1 MH12.1 U7.1 U7.5 U7.8 U8.3

## Polygon pours and split planes (outlines as drawn)
GND on Signal Layer 1 "GND2" (solid, pour order 14): 118.5,120.944 118.5,10.05 149.25,10.05 149.25,120.75 148.75,121.25
GND on Signal Layer 1 "GND" (solid, pour order 12): 1,121 1,-9 120.25,-9 120.25,121
RFgnd on Bottom Layer "RFGND_L04_P010" (solid, pour order 10): 138,50 138,62 124.5,62 149,62 149,-8.5 124.5,-8.5 124.4,-8.4 124.4,61.9 130,62 130,50
NetC2_1 on Bottom Layer "bot Layer- shield" (solid, pour order 18): 68.575,24.975 68.825,25.225 93.875,25.225 93.875,45.95 114.125,66.2 129.325,66.2 129.325,112.075 79.175,112.075 79.175,47.325 68.575,36.725 68.575,26.125 68.45,26
NetC2_1 on Top Layer "Logo" (solid, pour order 8): 78.575,111.41 78.575,62.625 127.6,62.625 127.6,111.507
NetC2_1 on Top Layer "Top Layer- shield" (solid, pour order 16): 68.725,25.325 68.8,25.25 93.875,25.25 93.875,45.675 108.65,60.45 127.675,60.45 127.675,67.25 127.15,67.775 78.6,67.775 78.6,60 81.05,57.55 81.05,48.925 68.725,36.6

## Other copper
Top Layer:
  region net VSUP: 43.5,11 43.5,0.1 48.3,-4.7 58.2,-4.7 59.1,-3.8 59.1,0.4 56,3.5 56,10.8 55.8,11
  region net VAMP: 60.75,-3.75 61.5,-4.5 64.5,-4.5 65.5,-3.5 66.85,0.175 60.75,1.5
  region net VAMP: 60.75,0.1 78.5,0.1 78.5,11 78.4,11 60.75,11
  region net GATE2: 47.752,82.867 47.752,72.072 50.292,72.072 50.292,82.867
  region net GATE1: 47.752,105.014 47.752,93.359 50.292,93.359 50.292,105.014
Signal Layer 2:
  region net VAMP: 60.775,-3.775 61.5,-4.5 64.5,-4.5 65.5,-3.5 66.625,0.275 60.775,1.5
  region net VAMP: 60.775,0.1 78.5,0.1 78.5,11 78.4,11 60.775,11
  region net VSUP: 43.5,11 43.5,0.1 48.3,-4.7 58.2,-4.7 59.05,-3.85 59.05,0.45 56,3.5 56,10.8 55.8,11
Bottom Layer:
  region net VSUP: 51,14.675 50.95,14.625 50.95,12.675 93.65,12.675 93.85,12.475 93.85,14.675
  region net NetC2_1: 51.162,23.662 54.8,27.3 89.25,27.3 89.25,27.1 92.725,23.625 92.225,23.125 51.825,23.125 51.8,23.1 51.725,23.1
  region net VSUP: 43.5,11.372 43.5,0.05 48.3,-4.75 58.2,-4.75 59.075,-3.875 59.075,0.375 56,3.45 56,10.75 56,12.888 53.862,12.888 51.171,12.888 50.171,12.75 50.171,11.372
  region net VAMP: 60.75,-3.75 61.5,-4.5 64.5,-4.5 65.367,-3.633 66.564,0.219 60.75,1.5
  region net VAMP: 60.75,0.1 78.5,0.1 78.5,10.5 77.9,10.5 60.75,10.5
  region net RFgnd: 138,62 138,55.1 138.2,54.9 145,54.9 145,61.9 144.9,62
Multi-Layer:
  lines w0.254: 0,-10.1 150,-10.1 ; 0,-10 0,122 150,122 150,-10

## Silkscreen, mask and mechanical layers (free items; w line width, h text height)
Top Overlay:
  circle w0.254: c111.9,17.75 r0.079
  circle w0.254: c45.75,22.821 r0.215
  circle w0.254: c80.89,-2.6 r0.175
  circle w0.254: c45.725,29.775 r0.25
  lines w0.254: 4.95,85.375 5.725,84.6 5.947,84.6 ; 22.975,85.125 24.45,85.125 24.85,84.725 24.85,84.4 ; 32.175,77.425 32.175,78.425 33.475,79.725 ; 38.453,89.176 38.453,88.047 39.125,87.375
  text "RF IN" at 14.5,64.6 h1.52
  text "LEDS" at 27.075,55.1 h1.52 r270
  text "BUTTON" at 27.075,44 h1.52 r270
  text "DC sup" at 11.1,25.7 h1.52 r270
  text "Vamp" at 70.025,11.75 h1.52
  text "DC IN" at 46.175,11.325 h1.52
  text "RF out" at 128.425,6.975 h1.52
  text "C" at 100.25,6.875 h1.2
  text "Enable" at 5,-0.675 h1.52
  text "monitor" at 29.925,-0.75 h1.52
Top Paste:
  lines w0.254: 0,0 150,0
Mechanical 1:
  lines w0.254: -0.1,0.1 0,0 ; 150.1,-10.1 150.175,-10.025 ; 0,-10 0,122 150,122 150,-10 0,-10
  lines w0.3: 0,0 150,0
Mechanical 3:
  lines w0.1: 51.1,65.5 69.1,65.5 69.1,110.5 51.1,110.5 51.1,65.5
  lines w0.254: 89,57 95,57 95,59 89,59 89,57 ; 89,116.7 95,116.7 95,118.7 89,118.7 89,116.7

## Text inside footprints (layer, text, board x,y; h text height)
CT1: Top Overlay "1" at 133.25,54.75 h1.52 r270; Top Overlay "2" at 133.25,10.25 h1.52 r270; Top Overlay "4" at 122.25,17 h1.52 r270; Top Overlay "3" at 121.75,48.25 h1.52 r270; Mechanical 1 "4" at 122.25,17 h1.52 r270; Mechanical 1 "3" at 121.75,48.25 h1.52 r270
P1: Top Overlay "1" at 5.778,14.707 h0.95 r90; Mechanical 1 "1" at 5.778,14.707 h0.95 r90
P2: Top Overlay "1" at 41.268,-4.222 h0.95 r180; Mechanical 1 "1" at 41.268,-4.222 h0.95 r180
P3: Top Overlay "1" at 5.778,33.227 h0.95 r90; Mechanical 1 "1" at 5.778,33.227 h0.95 r90
P4: Top Overlay "1" at 5.778,46.367 h0.95 r90; Mechanical 1 "1" at 5.778,46.367 h0.95 r90
P5: Top Overlay "1" at 134.75,62.65 h1.52 r90